# Altium PCB board_pcbv3.PcbDoc
Units mm, origin at the board's own origin, x right, y up, seen from the top; angles counter-clockwise.
Board outline 56 x 67 mm, 2 copper layers (Top Layer, Bottom Layer); 6 components, 8 nets, 70 pads, 1 vias.
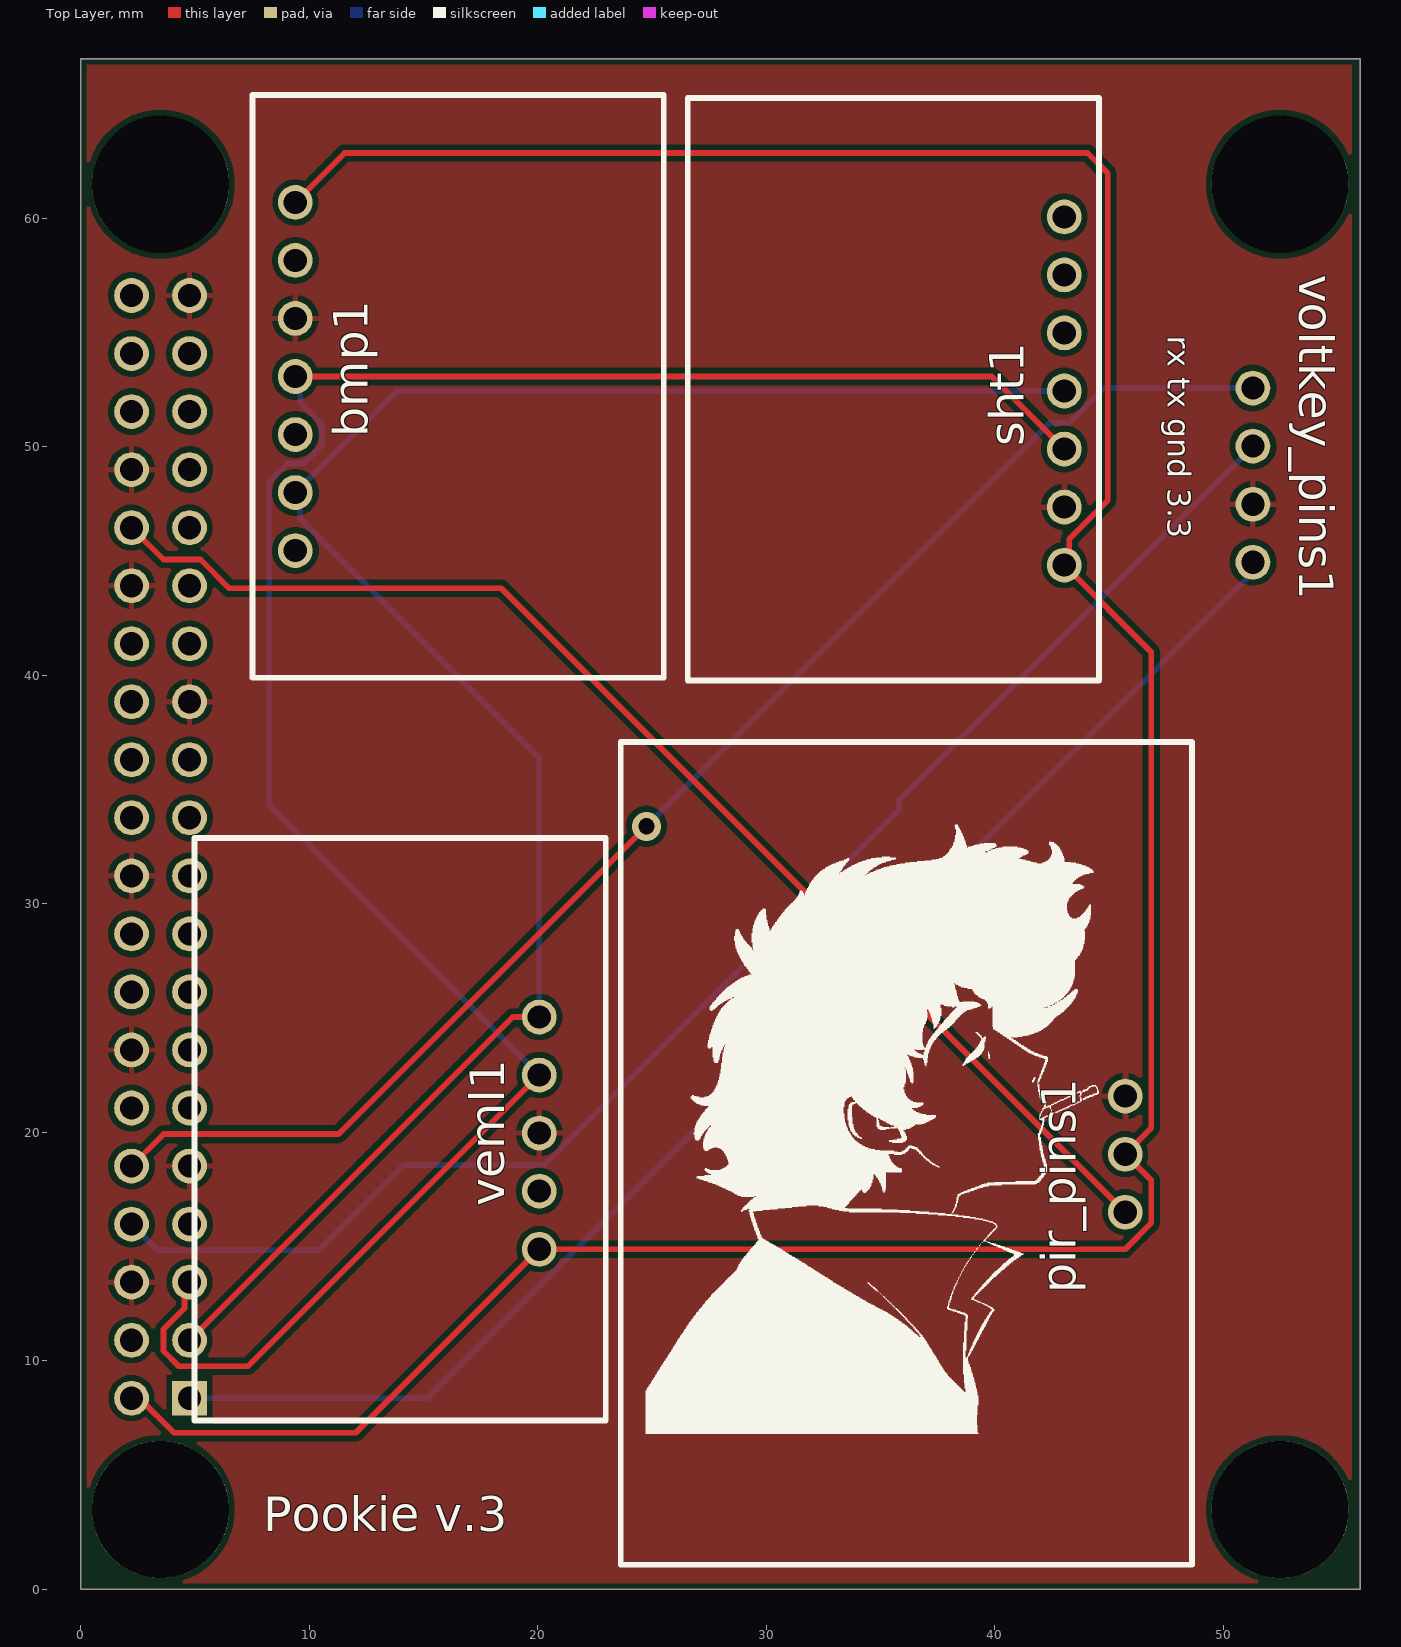
[diagram p0: Top Layer view]
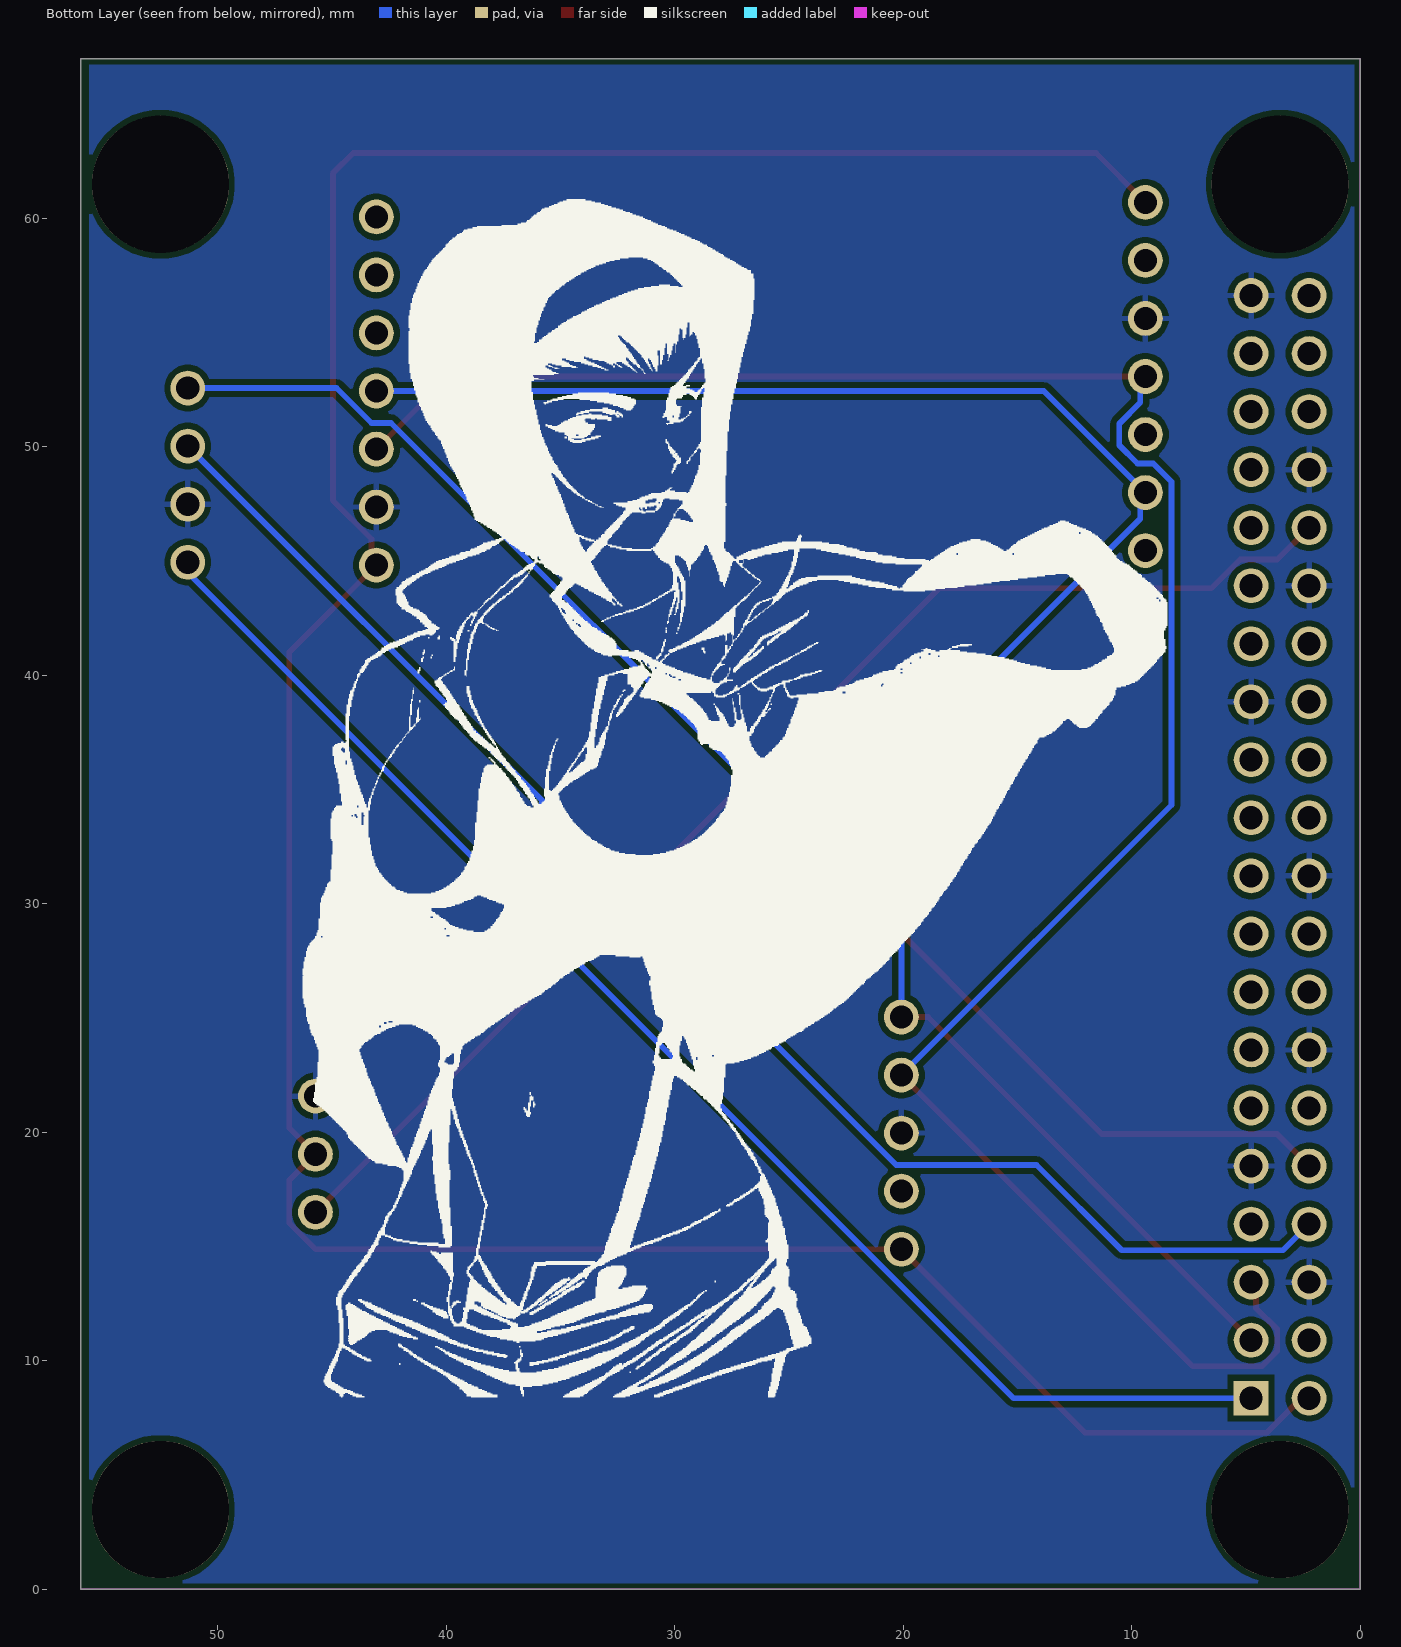
[diagram p1: Bottom Layer view, seen from below]

## Layer stack, top to bottom
Top Solder: solder mask 0.0102, Solder Resist, Dk 3.5
Top Layer: signal copper 0.0356
Dielectric 1: dielectric 0.32, FR-4, Dk 4.8
Bottom Layer: signal copper 0.0356
Bottom Solder: solder mask 0.0102, Solder Resist, Dk 3.5

## Board outline
0,0 56,0 56,67 0,67

## Design rules (kind name [scope] priority, off if disabled: settings)
Clearance [All] p1: gap=0.254 ignorepadtopadclearanceinfootprint=FALSE except(0: Arc-Hole Track-Hole SMDPad-Hole THPad-Hole Via-Hole Fill-Hole Poly-Hole Region-Hole Text-Hole)
PolygonConnect [All] p1: connectstyle=Relief reliefconductorwidth=0.254 reliefentries=4 polygonreliefangle="90 Angle" airgapwidth=0.254
RoutingVias [All] p1: holewidth=0.711 width=1.27 viastyle="Through Hole" minholewidth=0.711 minwidth=1.27 maxholewidth=0.711 maxwidth=1.27
SolderMaskExpansion [All] p1: expansion=0.102 istentingtop=FALSE
Width [All] p1: maxlimit=0.254 minlimit=0.254 preferedwidth=0.254
30 further rules are at their usual default settings.

## Classes and differential pairs
component class board: bmp1 Designator5 pir_pins1 veml1 voltkey_pins1

## Components (designator, comment, footprint, x,y, rotation, side; value= is the part's Value field where it differs from the comment)
bmp1 "BMP280_PINOUT" bmp280_footprint 4.583,57.564 r270 top
pir_pins1 "PIR_PINOUT" pir_footprint 45.593,19.05 r270 top
sht1 "SHT31_PINOUT" sht31_footprint 44.069,43.688 r90 top
U? "Comment" MODULE_RASPBERRY_PI_4B_4GB 3.5,32.5 r90 top
veml1 "VEML7700_PINOUT" veml7700_footprint 20.066,19.939 r90 top
voltkey_pins1 "VOLTKEY_PINOUT" voltkey_footprint 51.308,48.768 r90 top

## Footprints (in the part's own frame and the unit in brackets; to place one, negate y for a bottom-side part, rotate by r counter-clockwise, add the part's x,y. Pads: shape width x height; smd on the part's side, far side on the other; paste and mask are expansions set on the pad)
bmp280_footprint [mil]
  round 60 hole 40: 1(-123.7,189.57) 2(-23.7,189.57) 3(76.3,189.57) 4(176.3,189.57) 5(276.3,189.57) 6(376.3,189.57) 7(476.3,189.57)
MODULE_RASPBERRY_PI_4B_4GB [mil]
  rect 60x60 / inner round 60 / far side rect 60x60 hole 40: 1(-950,-50)
  round 60 hole 40: 2(-950,50) 3(-850,-50) 4(-850,50) 5(-750,-50) 6(-750,50) 7(-650,-50) 8(-650,50) 9(-550,-50) 10(-550,50) 11(-450,-50) 12(-450,50) 13(-350,-50) 14(-350,50) 15(-250,-50) 16(-250,50) 17(-150,-50) 18(-150,50) 19(-50,-50) 20(-50,50) 21(50,-50) 22(50,50) 23(150,-50) 24(150,50) 25(250,-50) 26(250,50) 27(350,-50) 28(350,50) 29(450,-50) 30(450,50) 31(550,-50) 32(550,50) 33(650,-50) 34(650,50) 35(750,-50) 36(750,50) 37(850,-50) 38(850,50) 39(950,-50) 40(950,50)
pir_footprint [mil]
  round 60 hole 40: 1(-100,5) 2(0,5) 3(100,5)
sht31_footprint [mil]
  round 60 hole 40: 1(45,40) 2(145,40) 3(245,40) 4(345,40) 5(445,40) 6(545,40) 7(645,40)
veml7700_footprint [mil]
  round 60 hole 40: 1(-198.7,-0.43) 2(-98.7,-0.43) 3(1.3,-0.43) 4(101.3,-0.43) 5(201.3,-0.43)
voltkey_footprint [mil]
  round 60 hole 40: 1(-150,0) 2(-50,0) 3(50,0) 4(150,0)

## Part data
U?: library part RASPBERRY_PI_4B_4GB, "BCM2711 Raspberry Pi 4 Model B 4GB - ARMÂ® CortexÂ®-A72 MPU Embedded Evaluation Board", Package=None, Availability="In Stock", Check_prices=https://www.snapeda.com/parts/RASPBERRY%20PI%204B/4GB/Raspberry+Pi/view-part/?ref=eda, MF="Raspberry Pi", MP="RASPBERRY PI 4B/4GB", Price=None, Purchase-URL="https://pricing.snapeda.com/search/part/RASPBERRY PI 4B/4GB/?ref=eda", SnapEDA_Link=https://www.snapeda.com/parts/RASPBERRY%20PI%204B/4GB/Raspberry+Pi/view-part/?ref=snap

## Free pads (board coordinates)
  round 6 hole 6: 1(3.5,61.5) 2(52.5,61.5) 3(3.5,3.5) 4(52.5,3.5)

## Via types
v1: diameter 1.27, hole 0.711, Top Layer to Bottom Layer, 1 vias

## Nets (pads, with @x,y where several pads share a name; then routed paths per layer and width w, separated by ;. In a path a pad name is that pad's centre, name@x,y a point inside that pad or via, vN(x,y) a via of type N, cw(c..) or ccw(c..) an arc to the next point about the centre after c; other vN are vias at no path point)
+3v3: U?.1 voltkey_pins1.1 | length 62
  Bottom Layer w0.254: U?.1 15.171,8.37 51.065,44.264 51.065,44.715 voltkey_pins1.1
+5: bmp1.1 pir_pins1.2 sht1.1 U?.2 veml1.1 | length 135.1
  Top Layer w0.254: U?.2 2.574,8.37 4.086,6.858 12.043,6.858 12.192,7.007 veml1.1 45.718,14.892 46.863,16.037 46.863,17.907 pir_pins1.2 46.863,20.193 46.863,41.021 sht1.1 43.272,45.05 43.272,45.974 44.958,47.66 44.958,61.976 44.069,62.865 11.557,62.865 bmp1.1
GND: bmp1.3 pir_pins1.1 sht1.2 U?.6 U?.9 U?.14 U?.20 U?.25 U?.30 U?.34 U?.39 veml1.3 voltkey_pins1.2
Netbmp1_4: bmp1.4 sht1.3 U?.5 veml1.4 | length 97.8
  Top Layer w0.254: U?.5 4.551,13.231 4.551,12.307 3.627,11.383 3.627,10.437 4.297,9.767 7.332,9.767 veml1.4 ; bmp1.4 39.878,53.086 sht1.3
  Bottom Layer w0.254: bmp1.4 9.617,52.867 9.617,51.943 10.541,51.019 10.541,50.073 9.744,49.276 9.052,49.276 8.255,48.479 8.255,34.334 veml1.4
Netbmp1_6: bmp1.6 sht1.4 U?.3 veml1.5 | length 84
  Top Layer w0.254: U?.3 18.912,25.052 veml1.5
  Bottom Layer w0.254: veml1.5 20.077,36.403 9.617,46.863 9.617,47.787 bmp1.6 13.843,52.451 sht1.4
NetDesignator5_8: U?.8 voltkey_pins1.3 | length 64.4
  Bottom Layer w0.254: U?.8 3.373,14.847 10.432,14.847 14.16,18.575 20.296,18.575 35.808,34.086 35.808,34.538 voltkey_pins1.3
NetDesignator5_10: U?.10 voltkey_pins1.4 | length 63.2
  Top Layer w0.254: U?.10 3.627,19.927 11.291,19.927 v1(24.765,33.401)
  Bottom Layer w0.254: v1(24.765,33.401) 42.418,51.054 43.272,51.054 44.796,52.578 voltkey_pins1.4
NetDesignator5_32: pir_pins1.3 U?.32 | length 55.9
  Top Layer w0.254: U?.32 3.627,45.073 5.243,45.073 6.501,43.815 18.415,43.815 pir_pins1.3
pads on no net: bmp1.2 bmp1.5 bmp1.7 sht1.5 sht1.6 sht1.7 U?.4 U?.7 U?.11 U?.12 U?.13 U?.15 U?.16 U?.17 U?.18 U?.19 U?.21 U?.22 U?.23 U?.24 U?.26 U?.27 U?.28 U?.29 U?.31 U?.33 U?.35 U?.36 U?.37 U?.38 U?.40 veml1.2

## Polygon pours and split planes (outlines as drawn)
GND on Bottom Layer "GND_L02_P001" (solid, remove dead copper, pour order 1): 0,68.326 0,0 55.499,0 55.626,0.127 55.626,68.072
GND on Top Layer "GND_L01_P000" (solid, remove dead copper, pour order 0): 0,68.326 0,0 55.499,0 55.626,0.127 55.626,68.072

## Keep-outs
Keep-Out Layer:
  the board outline again, w0.01

## Silkscreen, mask and mechanical layers (free items; w line width, h text height)
Top Overlay:
  drawing of 37 lines, arcs and shapes, not listed
  text "rx tx gnd 3.3" at 47.577,54.864 h1 r270
  text "Pookie v.3" at 8.001,2.54 h1.52
Bottom Overlay:
  drawing of 87 lines, arcs and shapes, not listed